# Altium PCB dcdc.PcbDoc
Units mm, origin at the board's own origin, x right, y up, seen from the top; angles counter-clockwise.
Board outline 150 x 70 mm, 4 copper layers (Top Layer, Layer 1, Layer 2, Bottom Layer), stack 0.603 mm thick; 40 components, 19 nets, 301 pads, 311 vias.
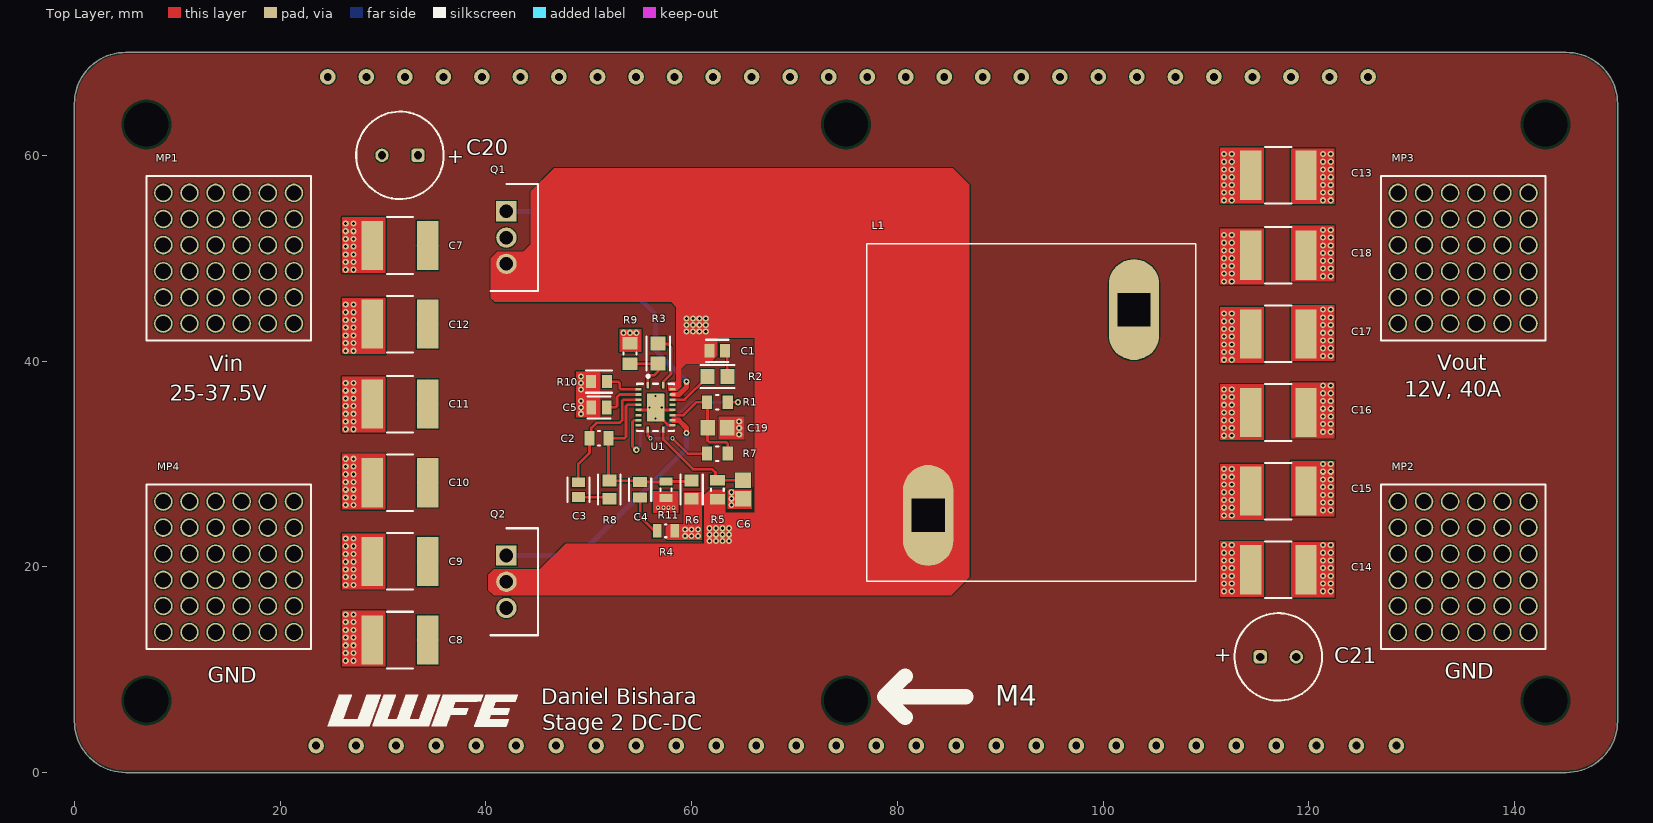
[diagram p0: Top Layer view]
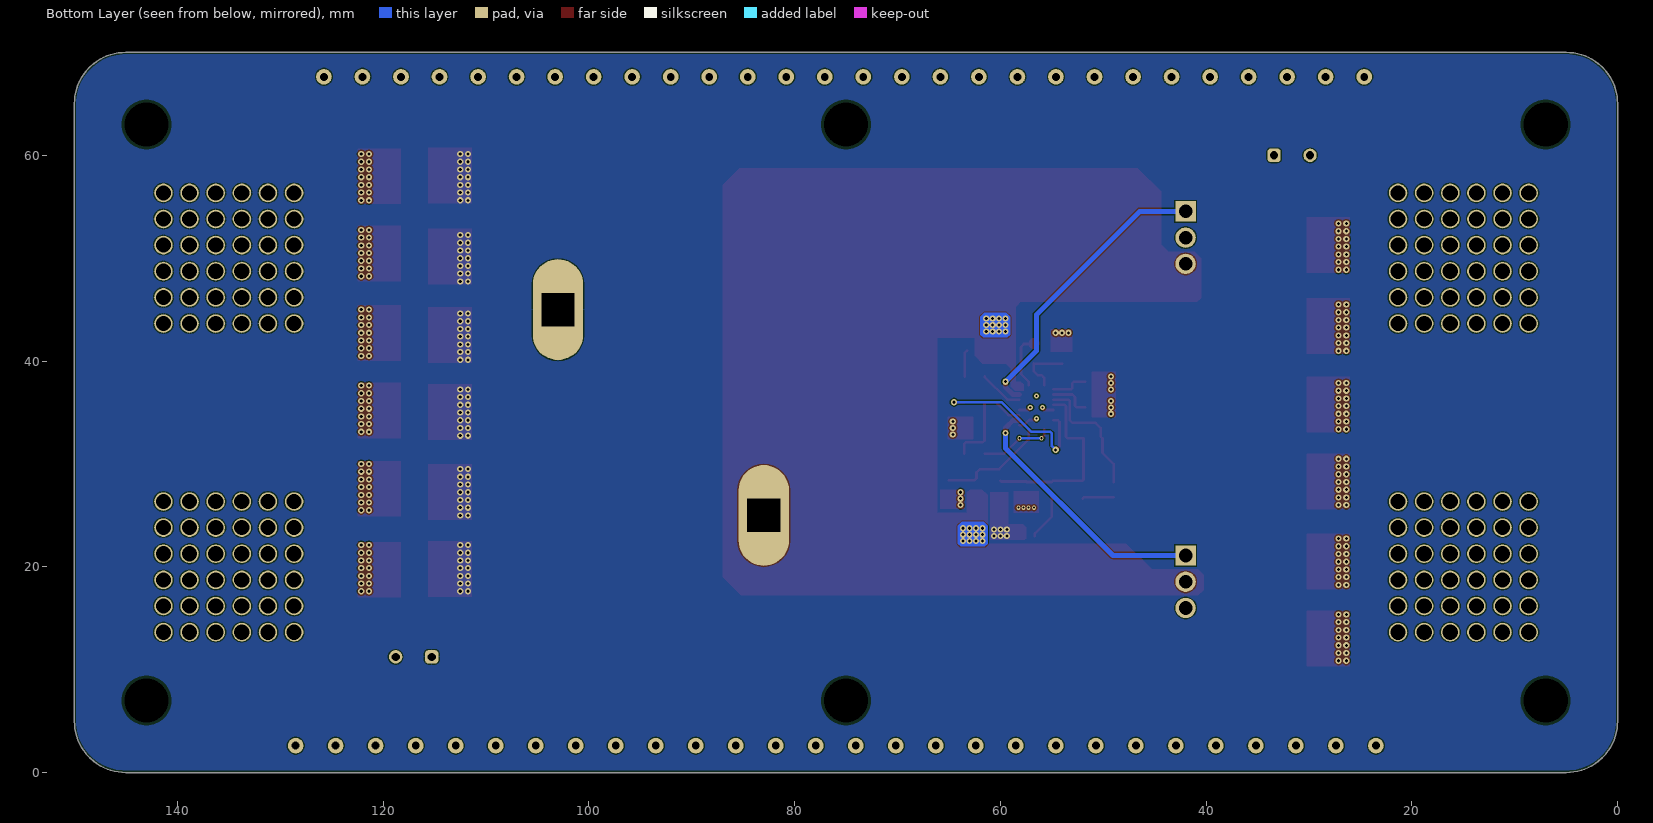
[diagram p1: Bottom Layer view, seen from below]
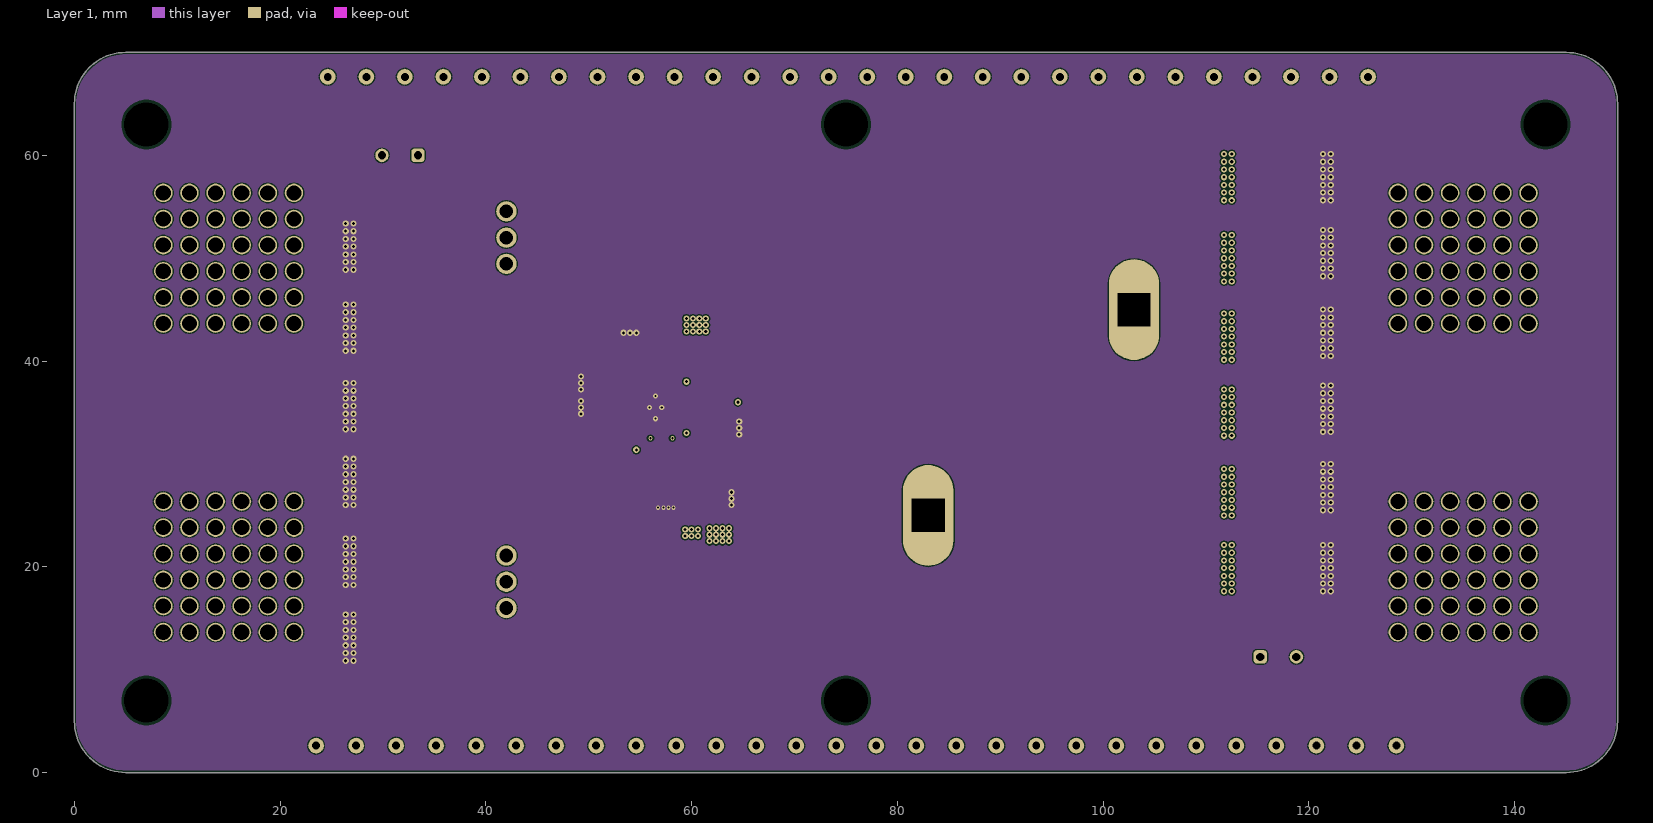
[diagram p2: Layer 1]
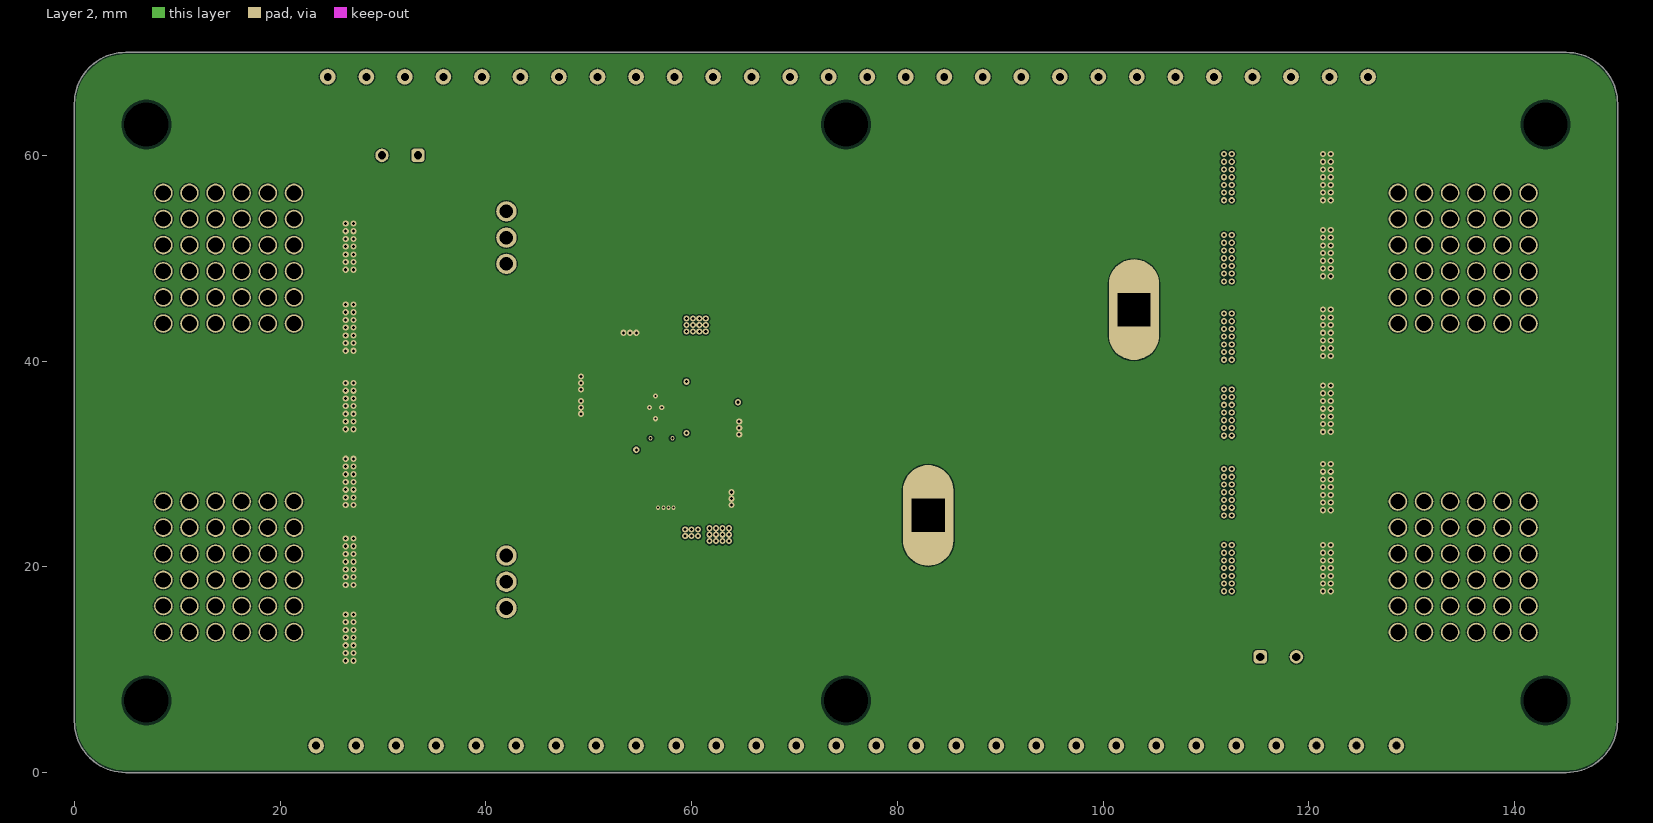
[diagram p3: Layer 2]
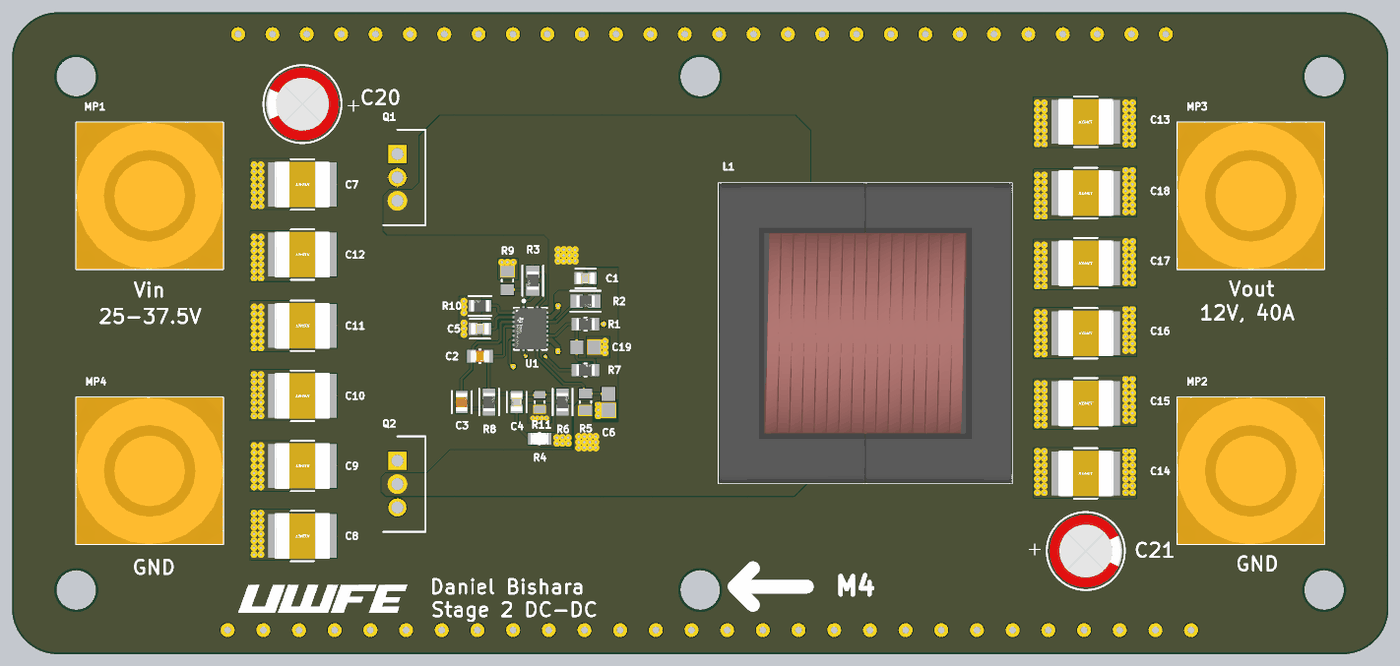
[diagram p4: 3D render of the assembled board from above, using the file's embedded part models]

## Layer stack, top to bottom
Top Solder: solder mask 0.0102, Solder Resist, Dk 3.5
Top Layer: signal copper 0.0356
Dielectric 2: prepreg 0.0711, PP-006, Dk 4.1
Layer 1: signal copper 0.035
Dielectric 1: dielectric 0.32, FR-4, Dk 4.8
Layer 2: signal copper 0.035
Dielectric 3: prepreg 0.0711, PP-006, Dk 4.1
Bottom Layer: signal copper 0.0356
Bottom Solder: solder mask 0.0102, Solder Resist, Dk 3.5

## Board outline
5.006,0.006 cw(c5.006,5.006) 0.006,5.006 0.006,65.006 cw(c5.006,65.006) 5.006,70.006 145.006,70.006 cw(c145.006,65.006) 150.006,65.006 150.006,5.006 cw(c145.006,5.006) 145.006,0.006

## Design rules (kind name [scope] priority, off if disabled: settings)
BoardOutlineClearance [All] p1: gap=0.2 ignorepadtopadclearanceinfootprint=FALSE
Clearance [All] p1: gap=0.102 ignorepadtopadclearanceinfootprint=FALSE except(0.127: Arc-Via Track-Via SMDPad-Via THPad-Via Via-Via Via-Fill Via-Poly Via-Region Via-Text; 0.25: Arc-Hole Track-Hole SMDPad-Hole THPad-Hole Via-Hole Fill-Hole Poly-Hole Region-Hole Text-Hole)
ComponentClearance [All] p1: gap=0.102 collisioncheckmode=3 verticalgap=0.102 showdistances=TRUE
DiffPairsRouting [All] p1: maxlimit=0.102 minlimit=0.102 mostfreqgap=0.102 toplayer_minwidth=0.102 toplayer_maxwidth=1816.048 toplayer_prefwidth=0.102 midlayer1_minwidth=0.102 midlayer1_maxwidth=1816.048 midlayer1_prefwidth=0.102 midlayer2_minwidth=0.102 midlayer2_maxwidth=1816.048 midlayer2_prefwidth=0.102 bottomlayer_minwidth=0.102 bottomlayer_maxwidth=1816.048 bottomlayer_prefwidth=0.102 maxuncoupledlength=12.7
Height [All] p1: minheight=0 maxheight=1816.048 prefheight=12.7
HoleSize [All] p1: absolutevalues=TRUE maxlimit=6.3 minlimit=0.2 maxpercent=80.000 minpercent=20.000
HoleToHoleClearance [All] p1: gap=0.25 allowstackedmicrovias=FALSE
MinimumAnnularRing [All] p1: minimumring=0.076
MinimumSolderMaskSliver [All] p1: minsoldermaskwidth=0
PlaneClearance [All] p1: clearance=0.102
PlaneConnect PlaneConnectPowerPads [InPadClass('PowerPads')] p1: planeconnectstyle=Direct reliefexpansion=0.508 reliefentries=4 reliefconductorwidth=0.254 reliefairgap=0.254
PlaneConnect [All] p2: pad.planeconnectstyle=Relief pad.reliefexpansion=0.3 pad.reliefentries=4 pad.reliefconductorwidth=0.102 pad.reliefairgap=0.102 via.planeconnectstyle=Direct via.reliefexpansion=0.3 via.reliefentries=4 via.reliefconductorwidth=0.127 via.reliefairgap=0.127
PolygonConnect PolygonConnectPowerPads [All vs (InPadClass('PowerPads'))] p1: connectstyle=Direct reliefconductorwidth=0.254 reliefentries=4 polygonreliefangle="90 Angle" airgapwidth=0.254
PolygonConnect [All] p2: thpad.connectstyle=Relief thpad.reliefconductorwidth=0.102 thpad.reliefentries=4 thpad.polygonreliefangle="90 Angle" thpad.airgapwidth=0.102 smdpad.connectstyle=Relief smdpad.reliefconductorwidth=0.102 smdpad.reliefentries=4 smdpad.polygonreliefangle="90 Angle" smdpad.airgapwidth=0.102 via.connectstyle=Direct via.reliefconductorwidth=0.127 via.reliefentries=4 via.polygonreliefangle="90 Angle" via.airgapwidth=0.127
RoutingVias [All] p1: holewidth=0.2 width=0.45 viastyle="Through Hole" minholewidth=0.2 minwidth=0.45 maxholewidth=6.3 maxwidth=6.55
SilkToSilkClearance [All] p1: silktosilkclearance=0
SilkToSolderMaskClearance [IsPad] p1: minsilkscreentomaskgap=0.102 clearancetoexposedcopper=TRUE
SolderMaskExpansion [All] p1: expansion=0.075 istentingtop=FALSE
SupplyNets "Schematic Supply Nets" [InNet('GND')] p1: voltage=0.000
Width [All] p1: maxlimit=1816.048 minlimit=0.102 preferedwidth=0.102
20 further rules are at their usual default settings.

## Classes and differential pairs
component class Conectors: C7 C8 C9 C10 C11 C12 C13 C14 C15 C16 C17 C18 C20 C21 MP1 MP2 MP3 MP4
component class Buck: C1 C2 C3 C4 C5 C6 C19 L1 Q1 Q2 R1 R2 R3 R4 R5 R6 R7 R8 R9 R10 R11 U1

## Components (designator, comment, footprint, x,y, rotation, side; value= is the part's Value field where it differs from the comment)
C1 "C0805C104K5RACTU" FP-C0805C-DN-MFG 62.5,41 r0 top value="0.10 μF"
C2 "CC0805KRX7R9BB221" FP-CC0805-0_85-MFG 51,32.5 r0 top value="220 pF"
C3 "GRM2165C1H472JA01D" FP-GRM216-0_1-IPC_C 49,27.5 r90 top
C4 "C0805C102J5GACTU" FP-C0805C-DN-MFG 55,27.5 r90 top value="1,000 pF"
C5 "C0805C473K5RACTU" FP-C0805C-DN-MFG 51,35.5 r180 top value="47,000 pF"
C6 "C0805C100JDGACTU" CAPC2013X88X50ML20T25 65,27.5 r270 top
C7 "C2220C226M5R2C7289" FP-C2220C226M5R2C7289-MFG 31.651,51.236 r180 top
C8 "C2220C226M5R2C7289" FP-C2220C226M5R2C7289-MFG 31.651,12.889 r180 top
C9 "C2220C226M5R2C7289" FP-C2220C226M5R2C7289-MFG 31.651,20.533 r180 top
C10 "C2220C226M5R2C7289" FP-C2220C226M5R2C7289-MFG 31.651,28.177 r180 top
C11 "C2220C226M5R2C7289" FP-C2220C226M5R2C7289-MFG 31.651,35.821 r180 top
C12 "C2220C226M5R2C7289" FP-C2220C226M5R2C7289-MFG 31.651,43.592 r180 top
C13 "C2220C226M5R2C7289" FP-C2220C226M5R2C7289-MFG 117.026,58.062 r0 top
C14 "C2220C226M5R2C7289" FP-C2220C226M5R2C7289-MFG 117.026,19.715 r0 top
C15 "C2220C226M5R2C7289" FP-C2220C226M5R2C7289-MFG 117.026,27.359 r0 top
C16 "C2220C226M5R2C7289" FP-C2220C226M5R2C7289-MFG 117.026,35.003 r0 top
C17 "C2220C226M5R2C7289" FP-C2220C226M5R2C7289-MFG 117.026,42.647 r0 top
C18 "C2220C226M5R2C7289" FP-C2220C226M5R2C7289-MFG 117.026,50.291 r0 top
C19 "GRM21BR71A225KA01L" CAPC2013X135X50ML10T20 62.5,33.5 r180 top
C20 "860040674004" WCAP-ATUL_D8H11.5 31.651,60 r0 top
C21 "860040674004" WCAP-ATUL_D8H11.5 117.026,11.25 r180 top
L1 "CPRX3231L-8R2MC" CPRX3231L-8R2MC 93,35 r0 top value=8.2uH
MP1 "7461100" "7461100_chemical surface" 15,50 r0 top
MP2 "7461100" "7461100_chemical surface" 135,20 r0 top
MP3 "7461100" "7461100_chemical surface" 135,50 r0 top
MP4 "7461100" "7461100_chemical surface" 15,20 r0 top
Q1 "STP130N6F7" TO255P460X1020X2008-3P 42,54.55 r270 top
Q2 "STP130N6F7" TO255P460X1020X2008-3P 42,21.1 r270 top
R1 "RN73C2A20KBTDF" FP-RN732A-MFG 62.5,36 r0 top value=20KΩ
R2 "RMCF0805JT2R20" FP-RMCF0805-IPC_A 62.5,38.5 r0 top
R3 "RMCF0805FT301K" FP-RMCF0805-IPC_A 56.75,40.75 r270 top
R4 "CRCW0805127RFKEA" FP-CRCW0805-e3-IPC_C 57.5,23.5 r180 top
R5 "RK73H2ATTD2101F" RESC2013X60X30NL20T20 62.5,27.5 r90 top
R6 "RMCF0805FT22K1" FP-RMCF0805-IPC_B 60,27.5 r90 top
R7 "RN73C2A20KBTDF" FP-RN732A-MFG 62.5,31 r0 top value=20KΩ
R8 "RMCF0805FT6K04" FP-RMCF0805-IPC_B 52,27.5 r90 top
R9 "RC0805FR-0713K3L" RESC2013X60X35ML10T20 54,40.75 r90 top
R10 "RMCF0805FT40K2" FP-RMCF0805-IPC_C 51,38 r180 top
R11 "RC0805FR-071K58L" RESC2013X60X35LL10T20 57.5,27.5 r270 top
U1 "LM5146QRGYTQ1" FP-RGY0020B-MFG 56.5,35.5 r0 top

## Footprints (in the part's own frame and the unit in brackets; to place one, negate y for a bottom-side part, rotate by r counter-clockwise, add the part's x,y. Pads: shape width x height; smd on the part's side, far side on the other; paste and mask are expansions set on the pad)
"7461100_chemical surface" [mm] "M10, thread 16mm"
  round 1.8 hole 1.475: 1(-6.35,-6.35) 1(-6.35,-3.81) 1(-6.35,-1.27) 1(-6.35,1.27) 1(-6.35,3.81) 1(-6.35,6.35) 1(-3.81,-6.35) 1(-3.81,-3.81) 1(-3.81,-1.27) 1(-3.81,1.27) 1(-3.81,3.81) 1(-3.81,6.35) 1(-1.27,-6.35) 1(-1.27,-3.81) 1(-1.27,-1.27) 1(-1.27,1.27) 1(-1.27,3.81) 1(-1.27,6.35) 1(1.27,-6.35) 1(1.27,-3.81) 1(1.27,-1.27) 1(1.27,1.27) 1(1.27,3.81) 1(1.27,6.35) 1(3.81,-6.35) 1(3.81,-3.81) 1(3.81,-1.27) 1(3.81,1.27) 1(3.81,3.81) 1(3.81,6.35) 1(6.35,-6.35) 1(6.35,-3.81) 1(6.35,-1.27) 1(6.35,1.27) 1(6.35,3.81) 1(6.35,6.35)
  silkscreen extent -8,-8 8,8, body extent -8,-8 8,8, height 24
CAPC2013X88X50ML20T25 [mm] "Chip Capacitor, 2-Leads, Body 2.00x1.25mm, IPC Low Density"
  rect 1.5x1.55 smd: 1(-0.9,0) 2(0.9,0)
  body extent -1.1,-0.72 1.1,0.72, height 0.88
CAPC2013X135X50ML10T20 [mm] "Chip Capacitor, 2-Leads, Body 2.00x1.25mm, IPC Low Density"
  rect 1.4x1.5 smd: 1(-0.95,0) 2(0.95,0)
  body extent -1.05,-0.67 1.05,0.67, height 1.35
CPRX3231L-8R2MC [mm]
  oval 4.9x9.8 hole 3.2 square: 1(-10,-10) 2(10,10)
  silkscreen extent -16,-16.4 16,16.4, body extent -16,-16.4 16,16.4, height 28.5
FP-C0805C-DN-MFG [mm]
  rect 0.95x1.35 smd paste+0 mask+0: 1(-0.75,0) 2(0.75,0)
  silkscreen extent -1.1,-1.07 1.1,1.07, body extent -1.4,-0.85 1.4,0.85, height 0.25
FP-C2220C226M5R2C7289-MFG [mm]
  rect 2.08x4.78 smd paste+0 mask+0: 1(-2.69,0) 2(2.69,0)
  silkscreen extent -1.28,-2.75 1.28,2.75, body extent -3.85,-3 3.85,3, height 0.25
FP-CC0805-0_85-MFG [mm]
  rect 0.95x1.4 smd paste+0 mask+0: 1(-0.925,0) 2(0.925,0)
  silkscreen extent -0.08,-0.72 0.08,0.72, body extent -1.6,-1.05 1.6,1.05, height 0.25
FP-CRCW0805-e3-IPC_C [mil]
  rect 31.75x51.5 smd paste+0 mask+0: 1(-33.5,0) 2(33.5,0)
  silkscreen extent -3,-25 3,25, body extent -53,-31 53,31, height 10
FP-GRM216-0_1-IPC_C [mm]
  rect 0.958x1.261 smd paste+0 mask+0: 1(-0.727,0) 2(0.727,0)
  silkscreen extent -1.21,-1.07 1.21,1.07, body extent -1.31,-0.77 1.31,0.77, height 0.25
FP-RGY0020B-MFG [mm]
  rrect40% 0.25x0.6 smd paste+0 mask+0: 1(-0.75,2.15) 10(-0.75,-2.15) 11(0.75,-2.15) 20(0.75,2.15)
  rrect40% 0.6x0.25 smd paste+0 mask+0: 2(-1.65,1.75) 3(-1.65,1.25) 4(-1.65,0.75) 5(-1.65,0.25) 6(-1.65,-0.25) 7(-1.65,-0.75) 8(-1.65,-1.25) 9(-1.65,-1.75) 12(1.65,-1.75) 13(1.65,-1.25) 14(1.65,-0.75) 15(1.65,-0.25) 16(1.65,0.25) 17(1.65,0.75) 18(1.65,1.25) 19(1.65,1.75)
  rrect6% 1.7x2.7 smd paste-1000 mask+0: 21(0,0)
  silkscreen extent -1.8,-2.3 1.8,3.15, body extent -2.05,-2.55 2.05,2.55, height 0.25
FP-RMCF0805-IPC_A [mm]
  rect 1.355x1.462 smd paste+0 mask+0: 1(-0.976,0) 2(0.976,0)
  silkscreen extent -1.65,-1.13 1.65,1.13, body extent -2.15,-1.23 2.15,1.23, height 0.25
FP-RMCF0805-IPC_B [mm]
  rect 1.155x1.362 smd paste+0 mask+0: 1(-0.876,0) 2(0.876,0)
  silkscreen extent -1.45,-1.08 1.45,1.08, body extent -1.7,-0.93 1.7,0.93, height 0.25
FP-RMCF0805-IPC_C [mm]
  rect 0.955x1.262 smd paste+0 mask+0: 1(-0.776,0) 2(0.776,0)
  silkscreen extent -1.25,-1.07 1.25,1.07, body extent -1.35,-0.77 1.35,0.77, height 0.25
FP-RN732A-MFG [mm]
  rect 1x1.35 smd paste+0 mask+0: 1(-1,0) 2(1,0)
  silkscreen extent -0.13,-0.7 0.13,0.7, body extent -1.6,-0.8 1.6,0.8, height 0.25
RESC2013X60X30NL20T20 [mm] "Chip Resistor, 2-Leads, Body 2.00x1.25mm, IPC Medium Density"
  rect 1.05x1.45 smd: 1(-0.925,0) 2(0.925,0)
  silkscreen extent -0.1,-0.63 0.1,0.63, body extent -1.1,-0.72 1.1,0.72, height 0.6
RESC2013X60X35LL10T20 [mm] "Chip Resistor, 2-Leads, Body 2.00x1.25mm, IPC High Density"
  rect 0.8x1.25 smd: 1(-0.8,0) 2(0.8,0)
  silkscreen extent -0.1,-0.53 0.1,0.53, body extent -1.05,-0.67 1.05,0.67, height 0.6
RESC2013X60X35ML10T20 [mm] "Chip Resistor, 2-Leads, Body 2.00x1.25mm, IPC Low Density"
  rect 1.2x1.45 smd: 1(-1,0) 2(1,0)
  silkscreen extent -0.1,-0.63 0.1,0.63, body extent -1.05,-0.67 1.05,0.67, height 0.6
TO255P460X1020X2008-3P [mm]
  rect 1.98x1.98 / inner round 1.98 / far side rect 1.98x1.98 hole 1.32: 1(0,0)
  round 1.98 hole 1.32: 2(2.55,0) 3(5.1,0)
  silkscreen extent -2.65,-1.53 7.75,3.07
WCAP-ATUL_D8H11.5 [mm] "Aluminum Electrolytic Capacitors, 8x11.5mm"
  rrect50% 1.3x1.3 hole 0.8: 1(1.75,0)
  round 1.3 hole 0.8: 2(-1.75,0)
  silkscreen extent -4.25,-4.25 4.25,4.25, body extent -3.99,-4 4,4, height 11.81

## Part data
C1: library part CMP-2007-00279-2, "CAP CER 0.1UF 50V X7R 0805", Capacitance="0.10 μF", Manufacturer=KEMET, Package=C0805C-DN, Temperature="-55°C to +125°C", Temperature Characteristic=X7R, Temperature Coefficient=30ppm/°C, Temperature Range High=+125°C, Temperature Range Low=-55°C, Tolerance=0.1, Voltage Rating="50 V", Automotive=No, Category=Cap, ComponentLink2Description=Datasheet, ComponentLink2URL=https://content.kemet.com/datasheets/KEM_C1003_C0G_SMD.pdf, Device Class L1="Passive Components", Device Class L2=Capacitors, Device Class L3="Ceramic Capacitors", Digikey Description="CAP CER 0.1UF 50V X7R 0805", Height=0.88mm, Ipc Land Pattern Name=CAPC200125X78, Lead Free=Yes, Manufacturer Part Number=C0805C104K5RACTU, Material=Ceramic, Mouser Description="Cap Ceramic 0.1uF 50V X7R 10% SMD 2.0 x 1.2 mm 125 C Paper T/R", Octopart=https://octopart.com/c0805c104k5ractu-kemet-143926, RoHS=TRUE
C2: library part CMP-1036-02315-3, "CAP CER 220PF 50V X7R 0805", Capacitance="220 pF", Manufacturer=Yageo, Package=CC0805-0.85, Temperature="-30°C to +85°C", Temperature Characteristic=X7R, Temperature Range High=+85°C, Temperature Range Low=-30°C, Tolerance=0.1, Voltage Rating="50 V", Automotive=No, Category=Cap, ComponentLink2Description=Datasheet, ComponentLink2URL=http://www.yageo.com/documents/recent/UPY-GPHC_Y5V_6.3V-to-50V_8.pdf, Device Class L1="Passive Components", Device Class L2=Capacitors, Device Class L3="Ceramic Capacitors", Digikey Description="CAP CER 220PF 50V X7R 0805", Footprint Url=http://www.yageo.com/exep/pages/download/literatures/UPY-C_GEN_24.pdf, Height=0.95mm, Ipc Land Pattern Name=CAPC200125X85, Lead Free=Yes, Manufacturer Part Number=CC0805KRX7R9BB221, Material=Ceramic, Mouser Description="Surface Mount Ceramic Multilayer Capacitor 220pF 10% X7R 50V 0805 Paper T/R", Octopart=https://octopart.com/cc0805krx7r9bb221-yageo-39467731, RoHS=TRUE
C3: library part CMP-1036-03587-2, "Chip Multilayer Ceramic Capacitors for General Purpose, 0805, 4700pF, C0G, 30ppm/°C, 5%, 50V", Capacitance=4.7nF, Case Code (Imperial)=0805, Case Code (Metric)=2012, Dielectric=C0G, Max Operating Temperature=125°C, Min Operating Temperature=-55°C, Package Quantity=1, Temperature Coefficient=30ppm/°C, Tolerance=5%, Voltage=50V, Case/Package=0805, Depth=1.25mm, Height=0.6mm, Lead Free="Lead Free", Length=2mm, Material=Ceramic, Mount="Surface Mount", Number of Pins=2, Packaging="Tape and Reel", REACH SVHC="No SVHC", RoHS Compliant=Yes, Termination=SMD/SMT, Thickness=0.028inch, Voltage Rating=50V, Voltage Rating (DC)=50V, Width=0.049inch
C4: library part CMP-2007-00235-2, "CAP CER 1000PF 50V C0G/NP0 0805", Capacitance="1,000 pF", Manufacturer=KEMET, Package=C0805C-DN, Temperature="-55°C to +125°C", Temperature Characteristic=C0G, Temperature Coefficient=30ppm/°C, Temperature Range High=+125°C, Temperature Range Low=-55°C, Tolerance=0.05, Voltage Rating="50 V", Automotive=No, Category=Cap, ComponentLink2Description=Datasheet, ComponentLink2URL=https://content.kemet.com/datasheets/KEM_C1003_C0G_SMD.pdf, Device Class L1="Passive Components", Device Class L2=Capacitors, Device Class L3="Ceramic Capacitors", Digikey Description="CAP CER 1000PF 50V C0G/NP0 0805", Height=0.88mm, Ipc Land Pattern Name=CAPC200125X78, Lead Free=Yes, Manufacturer Part Number=C0805C102J5GACTU, Material=Ceramic, Mouser Description="Multilayer Ceramic Capacitors MLCC - SMD/SMT 50volts 1000pF C0G 5%", Octopart=https://octopart.com/c0805c102j5gactu-kemet-97757, RoHS=TRUE
C5: library part CMP-2007-01098-2, "CAP CER 0.047UF 50V X7R 0805", Capacitance="47 nF", Manufacturer=KEMET, Package=C0805C-DN, Temperature="-55°C to +125°C", Temperature Characteristic=X7R, Temperature Coefficient=30ppm/°C, Temperature Range High=+125°C, Temperature Range Low=-55°C, Tolerance=0.1, Voltage Rating="50 V", Automotive=No, Category=Cap, ComponentLink2Description=Datasheet, ComponentLink2URL=https://content.kemet.com/datasheets/KEM_C1003_C0G_SMD.pdf, Device Class L1="Passive Components", Device Class L2=Capacitors, Device Class L3="Ceramic Capacitors", Digikey Description="CAP CER 0.047UF 50V X7R 0805", Height=0.88mm, Ipc Land Pattern Name=CAPC200125X78, Lead Free=Yes, Manufacturer Part Number=C0805C473K5RACTU, Material=Ceramic, Mouser Description="Capacitor; Ceramic; Cap 0.047 uF; Tol 10%; Vol-Rtg 50 VDC; SMT; 0805; X7R; Tape&Reel", Octopart=https://octopart.com/c0805c473k5ractu-kemet-138387, RoHS=TRUE
C6: library part CMP-2007-00220-1, Capacitance=10pF, Manufacturer=Kemet, Part Number=C0805C100JDGACTU
C7 C8 C9 C10 C11 C12 C13 C14 C15 C16 C17 C18: library part CMP-03020-034691-1, "CAP CER 22UF 50V X7R SMD", Capacitance=22uF, Case/Package=SMD/SMT, Dielectric Material=Ceramic, Max Operating Temperature=125°C, Min Operating Temperature=-55°C, Package Quantity=1, Tolerance=20%, Voltage Rating=50V, Length=0.236inch, Mount="Surface Mount", Packaging="Tape and Reel", RoHS Compliant=Yes, Thickness=0.217inch, Voltage Rating (DC)=50V, Width=0.197inch
C19: library part CMP-2007-03454-1, Capacitance=2.2uF, Manufacturer=Murata, Part Number=GRM21BR71A225KA01L
C20 C21: library part CMP-03913-53914310-2, "WCAP-ATUL Aluminum Electrolytic Capacitors", Capacitance=100µF, Case/Package=Radial, Leakage Current=50µA, Max Operating Temperature=105°C, Min Operating Temperature=-40°C, Ripple Current=680mA, Tolerance=20%, Voltage Rating=50V, Diameter=8mm, Height=11.5mm, Height - Seated (Max)=13.0048mm, Impedance=160mΩ, Lead Pitch=3.5052mm, Length=11.5mm, Life (Hours)=7000hours, Mount="Through Hole", Packaging="Tape & Box (TB)", Pitch=3.5mm, Polarity=Polar, REACH SVHC=Unknown, RoHS=Compliant, Voltage Rating (DC)=50V
L1: Package=None, Availability=Unavailable, MP=CPEX3231A-330MC, Price=None
MP1 MP2 MP3 MP4: library part CMP-03913-18187408-2, "PCB power element shank terminal, 36P M10", Current Rating=350A, Max Operating Temperature=150°C, Min Operating Temperature=-55°C, Contact Material=Copper, Contact Plating=Tin, Height=24mm, Insulation=Non-Insulated, Length=16mm, Material=Brass, Mount="Through Hole", Number of Contacts=36, Number of Pins=36, Packaging=Bulk, REACH SVHC=Unknown, RoHS=Compliant, Termination=Press-Fit, Thread Size=M10, Width=16mm
Q1 Q2: "N-channel 60 V, 4.2 m typ., 80 A STripFET F7 Power MOSFET in a TO-220 package", Manufacturer_Name=STMicroelectronics, Mouser Part Number=511-STP130N6F7, Datasheet Link=https://www.st.com/resource/en/datasheet/stp130n6f7.pdf, Geometry.Height=4.6mm, Manufacturer_Part_Number=STP130N6F7, Mouser Price/Stock=https://www.mouser.co.uk/ProductDetail/STMicroelectronics/STP130N6F7?qs=bKenfurwlsnAlTA32qCHLw%3D%3D
R1 R7: library part CMP-03211-001671-1, "SMD Chip Resistor, Thin Film, 20KΩ, 100 V, 0805 [2012 Metric], 100 mW, 0.1%, RN73 Series", Manufacturer="TE Connectivity", Package=RN732A, Power Rating=0.1W, Resistance=20KΩ, Temperature="-55°C to 155°C", Temperature Coefficient=10ppm/°C, Temperature Range High=155°C, Temperature Range Low=-55°C, Tolerance=0.1%, Voltage Rating=100V, Automotive=No, Category=Res, ComponentLink2Description=Datasheet, ComponentLink2URL=https://www.te.com/commerce/DocumentDelivery/DDEController?Action=showdoc&DocId=Data+Sheet%7F1773270%7FP%7Fpdf%7FEnglish%7FENG_DS_1773270_P.pdf%7F1676162-2, Composition="Thin Film", Device Class L1="Passive Components", Device Class L2=Resistors, Device Class L3="Chip SMD Resistors", Height=0.65mm, Ipc Land Pattern Name=RESC200125X55, Lead Free=Yes, Manufacturer Part Number=RN73C2A20KBTDF, Octopart=https://octopart.com/rn73c2a20kbtdf-te+connectivity-21411984, octopart_url=https://octopart.com/rn73c2a20kbtdf-te+connectivity-21411984, Packaging="1000 Reel", RoHS=TRUE, SERIES=RN73
R2: library part CMP-26527-001415-1, "2.2Ω ±5% 0.125W 0805 Thick Film Chip Resistor AEC-Q200 compliant", Case Code (Imperial)=0805, Case Code (Metric)=2012, Max Operating Temperature=155°C, Max Power Dissipation=125mW, Min Operating Temperature=-55°C, Resistance=2.2Ω, Resistor Type="Thick Film", Temperature Coefficient=200ppm/°C, Tolerance=5%, Case/Package=0805, Contact Plating=Tin, Features="Automotive AEC-Q200", Height=0.026inch, Lead Free="Lead Free", Length=0.079inch, Mount="Surface Mount", Number of Terminations=2, Packaging="Tape and Reel", Radiation Hardening=No, RoHS Compliant=Yes, SERIES=RMCF, Width=0.049inch
R3: library part CMP-26527-003666-1, "301kΩ ±1% 0.125W 0805 Thick Film Chip Resistor AEC-Q200 compliant", Case Code (Imperial)=0805, Case Code (Metric)=2012, Max Operating Temperature=155°C, Max Power Dissipation=125mW, Min Operating Temperature=-55°C, Resistance=301kΩ, Resistor Type="Thick Film", Temperature Coefficient=100ppm/°C, Tolerance=1%, Case/Package=0805, Construction=Rectangular, Contact Plating=Tin, Depth=1.25mm, Features="Automotive AEC-Q200", Height=0.026inch, Lead Free="Lead Free", Length=0.079inch, Military Standard=Not, Mount="Surface Mount", Number of Terminations=2, Packaging="Tape and Reel", Radiation Hardening=No, RoHS Compliant=Yes, SERIES=RMCF, Width=0.049inch
R4: library part CMP-1013-00408-3, "RES Thick Film, 127Ω, 1%, 0.125W, 100ppm/°C, 0805", Case Code (Imperial)=0805, Case Code (Metric)=2012, Max Operating Temperature=155°C, Max Power Dissipation=125mW, Min Operating Temperature=-55°C, Package Quantity=10, Resistance=127R, Resistance Tolerance=1%, Resistor Type="Thick Film", Temperature Coefficient=100ppm/°C, Voltage Rating=150V, Case/Package=0805, Construction=Rectangular, Contact Plating=Tin, Depth=1.25mm, Features="Automotive AEC-Q200", Height=0.02inch, Lead Free="Lead Free", Length=2mm, Military Standard=Not, Number of Pins=2, Number of Terminations=2, Packaging="Tape and Reel", Power Rating=125mW, Radiation Hardening=No, RoHS Compliant=Yes, SERIES=CRCW, Termination=SMD/SMT, Tolerance=1%, Voltage Rating (DC)=150V, Weight=0.000194oz, Width=0.049inch
R5: library part CMP-2001-02195-1, Manufacturer="KOA Speer", Resistance=2.1kΩ, Part Number=RK73H2ATTD2101F
R6: library part CMP-26527-001411-1, "22.1kΩ ±1% 0.125W 0805 Thick Film Chip Resistor AEC-Q200 compliant", Case Code (Imperial)=0805, Case Code (Metric)=2012, Max Operating Temperature=155°C, Max Power Dissipation=125mW, Min Operating Temperature=-55°C, Resistance=22.1kR, Resistor Type="Thick Film", Temperature Coefficient=100ppm/°C, Tolerance=1%, Case/Package=0805, Construction=Rectangular, Contact Plating=Tin, Depth=1.25mm, Features="Automotive AEC-Q200", Height=0.026inch, Lead Free="Lead Free", Length=0.079inch, Military Standard=Not, Mount="Surface Mount", Number of Terminations=2, Packaging="Tape and Reel", Power Rating=125mW, Radiation Hardening=No, RoHS Compliant=Yes, SERIES=RMCF, Size Code=0805, Width=0.049inch
R8: library part CMP-26527-005687-1, "6.04kΩ ±1% 0.125W 0805 Thick Film Chip Resistor AEC-Q200 compliant", Case Code (Imperial)=0805, Case Code (Metric)=2012, Max Operating Temperature=155°C, Max Power Dissipation=125mW, Min Operating Temperature=-55°C, Resistance=6.04kR, Resistor Type="Thick Film", Temperature Coefficient=100ppm/°C, Tolerance=1%, Case/Package=0805, Construction=Rectangular, Contact Plating=Tin, Depth=1.25mm, Features="Automotive AEC-Q200", Height=0.026inch, Lead Free="Lead Free", Length=0.079inch, Military Standard=Not, Mount="Surface Mount", Number of Terminations=2, Packaging="Tape and Reel", Power Rating=125mW, Radiation Hardening=No, RoHS Compliant=Yes, SERIES=RMCF, Size Code=0805, Width=0.049inch
R9: library part CMP-2001-00918-1, Manufacturer=Yageo, Resistance=13.3kΩ, Part Number=RC0805FR-0713K3L
R10: library part CMP-26527-006371-1, "40.2kΩ ±1% 0.125W 0805 Thick Film Chip Resistor AEC-Q200 compliant", Case Code (Imperial)=0805, Case Code (Metric)=2012, Max Operating Temperature=155°C, Max Power Dissipation=125mW, Min Operating Temperature=-55°C, Resistance=40.2kR, Resistor Type="Thick Film", Temperature Coefficient=100ppm/°C, Tolerance=1%, Case/Package=0805, Construction=Rectangular, Contact Plating=Tin, Depth=1.25mm, Features="Automotive AEC-Q200", Height=0.026inch, Lead Free="Lead Free", Length=2mm, Military Standard=Not, Mount="Surface Mount", Number of Terminations=2, Packaging="Tape and Reel", Power Rating=125mW, Radiation Hardening=No, RoHS Compliant=Yes, SERIES=RMCF, Size Code=0805, Width=0.049inch
R11: library part CMP-2001-00963-1, Manufacturer=Yageo, Resistance=1.58k, Part Number=RC0805FR-071K58L
U1: library part CMP-04918-000302-1, "IC REG BUCK ADJ 3.5A 20VQFN", RoHS Compliant=Yes

## Free pads (board coordinates)
  round 1.524 hole 4.3 unplated: 5(7,7) 5(7,63) 5(75,7) 5(75,63) 5(143,7) 5(143,63)
  round 1.524 hole 0.762: 6(23.5,2.625) 6(28.384,67.625) 7(24.639,67.625) 7(27.389,2.625) 8(31.278,2.625) 8(32.129,67.625) 9(35.167,2.625) 9(35.873,67.625) 10(39.056,2.625) 10(39.618,67.625) 11(50.722,2.625) 11(50.853,67.625) 12(54.598,67.625) 12(54.611,2.625) 13(65.832,67.625) 13(66.278,2.625) 14(73.322,67.625) 14(74.056,2.625) 15(80.812,67.625) 15(81.833,2.625) 16(92.046,67.625) 16(93.5,2.625) 17(99.536,67.625) 17(101.278,2.625) 18(77.067,67.625) 18(77.944,2.625) 19(58.343,67.625) 19(58.5,2.625) 20(42.944,2.625) 20(43.363,67.625) 21(46.833,2.625) 21(47.108,67.625) 22(62.087,67.625) 22(62.389,2.625) 23(69.577,67.625) 23(70.167,2.625) 24(88.301,67.625) 24(89.611,2.625) 25(95.791,67.625) 25(97.389,2.625) 26(107.026,67.625) 26(109.056,2.625) 27(103.281,67.625) 27(105.167,2.625) 28(107.026,67.625) 28(109.056,2.625) 29(118.26,67.625) 29(120.722,2.625) 30(122.005,67.625) 30(124.611,2.625) 31(125.75,67.625) 31(128.5,2.625) 32(110.771,67.625) 32(112.944,2.625) 33(114.515,67.625) 33(116.833,2.625) 34(84.557,67.625) 34(85.722,2.625)

## Via types
v1: diameter 0.6, hole 0.3, Top Layer to Bottom Layer, 301 vias
v2: diameter 0.4, hole 0.2, Top Layer to Bottom Layer, 6 vias
v3: diameter 0.5, hole 0.2, Top Layer to Bottom Layer, 4 vias

## Nets (pads, with @x,y where several pads share a name; then routed paths per layer and width w, separated by ;. In a path a pad name is that pad's centre, name@x,y a point inside that pad or via, vN(x,y) a via of type N, cw(c..) or ccw(c..) an arc to the next point about the centre after c; other vN are vias at no path point)
Comp: C2.1 C3.2 U1.4 | length 12.6
  Top Layer w0.254: C3.2 49,30 50.075,31.075 C2.1 50.25,32.675 50.25,33.5 50.75,34 53,34 53.25,34.25 53.25,36.101 53.399,36.25 U1.4
En: R3.2 R9.1 U1.1 | length 5.5
  Top Layer w0.254: R9.1 56.726,39.75 R3.2 ; U1.1 55.75,38.375 56,38.625 56.375,38.625 56.75,39 R3.2@56.75,39.75
Fb: C2.2 C4.2 R6.2 R8.2 R11.1 U1.5 | length 18.3
  Top Layer w0.254: U1.5 53.774,35.75 53.625,35.601 53.625,32.649 53.476,32.5 C2.2 51.925,28.451 R8.2 54.874,28.376 C4.2 57.45,28.25 R11.1 59.924,28.3 R6.2
GND: C5.2 C6.2 C7.2 C8.2 C9.2 C10.2 C11.2 C12.2 C13.2 C14.2 C15.2 C16.2 C17.2 C18.2 C19.1 C20.2 C21.2 MP2.1 MP4.1 pad.6 pad.7 pad.8 pad.9 pad.10 pad.11 pad.12 pad.13 pad.14 pad.15 pad.16 pad.17 pad.18 pad.19 pad.20 pad.21 pad.22 pad.23 pad.24 pad.25 pad.26 pad.27 pad.28 pad.29 pad.30 pad.31 pad.32 pad.33 pad.34 Q2.3 R9.2 R10.2 R11.2 U1.6 U1.12 U1.15 U1.21 | length 4.4
  Top Layer w0.254: U1.6 55.777,35.25 55.9,35.373 v3(55.9,35.5) ; v3(56.5,34.4) 56.623,34.277 57.223,34.277 57.75,33.75 U1.12 ; v3(57.1,35.5) 57.1,35.373 57.223,35.25 U1.15
  other v1: 26.375,10.875 27.125,10.875 26.375,11.625 27.125,11.625 26.375,12.375 27.125,12.375 26.375,13.125 27.125,13.125 26.375,13.875 27.125,13.875 26.375,14.625 27.125,14.625 26.375,15.375 27.125,15.375 121.375,17.625 122.125,17.625 26.375,18.25 27.125,18.25 121.375,18.375 122.125,18.375 26.375,19 27.125,19 121.375,19.125 122.125,19.125 26.375,19.75 27.125,19.75 121.375,19.875 122.125,19.875 26.375,20.5 27.125,20.5 121.375,20.625 122.125,20.625 26.375,21.25 27.125,21.25 121.375,21.375 122.125,21.375 26.375,22 27.125,22 121.375,22.125 122.125,22.125 26.375,22.75 27.125,22.75 121.375,25.5 122.125,25.5 26.375,26 27.125,26 63.875,26 121.375,26.25 122.125,26.25 63.875,26.625 26.375,26.75 27.125,26.75 121.375,27 122.125,27 63.875,27.25 26.375,27.5 27.125,27.5 121.375,27.75 122.125,27.75 26.375,28.25 27.125,28.25 121.375,28.5 122.125,28.5 26.375,29 27.125,29 121.375,29.25 122.125,29.25 26.375,29.75 27.125,29.75 121.375,30 122.125,30 26.375,30.5 27.125,30.5 64.625,32.875 121.375,33.125 122.125,33.125 26.375,33.375 27.125,33.375 64.625,33.5 121.375,33.875 122.125,33.875 26.375,34.125 27.125,34.125 64.625,34.125 121.375,34.625 122.125,34.625 26.375,34.875 27.125,34.875 49.25,34.875 121.375,35.375 122.125,35.375 49.25,35.5 26.375,35.625 27.125,35.625 49.25,36.125 121.375,36.125 122.125,36.125 26.375,36.375 27.125,36.375 121.375,36.875 122.125,36.875 26.375,37.125 27.125,37.125 49.25,37.25 121.375,37.625 122.125,37.625 26.375,37.875 27.125,37.875 49.25,37.875 49.25,38.5 121.375,40.5 122.125,40.5 26.375,41 27.125,41 121.375,41.25 122.125,41.25 26.375,41.75 27.125,41.75 121.375,42 122.125,42 26.375,42.5 27.125,42.5 53.375,42.75 54,42.75 54.625,42.75 121.375,42.75 122.125,42.75 26.375,43.25 27.125,43.25 121.375,43.5 122.125,43.5 26.375,44 27.125,44 121.375,44.25 122.125,44.25 26.375,44.75 27.125,44.75 121.375,45 122.125,45 26.375,45.5 27.125,45.5 121.375,48.25 122.125,48.25 26.375,48.875 27.125,48.875 121.375,49 122.125,49 26.375,49.625 27.125,49.625 121.375,49.75 122.125,49.75 26.375,50.375 27.125,50.375 121.375,50.5 122.125,50.5 26.375,51.125 27.125,51.125 121.375,51.25 122.125,51.25 26.375,51.875 27.125,51.875 121.375,52 122.125,52 26.375,52.625 27.125,52.625 121.375,52.75 122.125,52.75 26.375,53.375 27.125,53.375 121.375,55.625 122.125,55.625 121.375,56.375 122.125,56.375 121.375,57.125 122.125,57.125 121.375,57.875 122.125,57.875 121.375,58.625 122.125,58.625 121.375,59.375 122.125,59.375 121.375,60.125 122.125,60.125
  other v2: 56.75,25.75 57.25,25.75 57.75,25.75 58.25,25.75
  other v3: 56.5,36.6
Ho: Q1.1 U1.18 | length 28.6
  Top Layer w0.5: U1.18 58.785,36.75 59.5,37.465 v1(59.5,38)
  Bottom Layer w0.5: Q1.1 46.45,54.55 56.5,44.5 56.5,41 v1(59.5,38)
ILIM: C6.1 R5.2 U1.11 | length 10.7
  Top Layer w0.254: U1.11 57.25,32.375 60.125,29.5 62,29.5 62.318,29.182 62.318,28.607 R5.2 64.975,28.425 C6.1
Lo: Q2.1 U1.13 | length 25.4
  Top Layer w0.5: U1.13@58.2,34.25 58.758,34.25 59.5,33.508 v1@59.5,33.027
  Bottom Layer w0.5: Q2.1 49.068,21.1 59.5,31.532 v1(59.5,33)
NetC1_2: C1.2 R2.2 | length 2.6
  Top Layer w0.254: C1.2 63.476,40.774 R2.2
NetC3_1: C3.1 R8.1 | length 3.1
  Top Layer w0.254: C3.1 51.851,26.773 R8.1
NetC4_1: C4.1 R4.2 | length 4.4
  Top Layer w0.254: C4.1 55,24.9 56.649,23.251 R4.2@56.649,23
NetR2_1: R2.1 U1.17 | length 4.3
  Top Layer w0.254: U1.17 59.328,36.25 61.524,38.446 R2.1
Pgood: R7.1 U1.10 | length 7.1
  Top Layer w0.254: U1.10 55.75,32.75 v2(56,32.5) ; v2(58.125,32.5) 59.625,31 R7.1
  Bottom Layer w0.254: v2(56,32.5) v2(58.125,32.5)
Rt: R10.1 U1.2 | length 3.6
  Top Layer w0.254: R10.1 52.851,38 53,37.851 53,37.399 53.149,37.25 U1.2
SS: C5.1 U1.3 | length 4.1
  Top Layer w0.254: C5.1 52.601,35.5 52.75,35.649 52.75,36.5 53,36.75 U1.3
Sw: C1.1 L1.1 Q1.3 Q2.2 R5.1 U1.19
  other v1: 61.75,22.5 62.375,22.5 63,22.5 63.625,22.5 61.75,23.125 62.375,23.125 63,23.125 63.625,23.125 61.75,23.75 62.375,23.75 63,23.75 63.625,23.75 59.5,42.875 60.125,42.875 60.75,42.875 61.375,42.875 59.5,43.5 60.125,43.5 60.75,43.5 61.375,43.5 59.5,44.125 60.125,44.125 60.75,44.125 61.375,44.125
SyncIn: R1.2 U1.8 | length 17.1
  Top Layer w0.254: v1(54.625,31.375) 54.572,31.375 54.25,31.697 54.25,34.101 54.399,34.25 U1.8 ; R1.2 v1(64.5,36)
  Bottom Layer w0.254: v1(54.625,31.375) 55,31.75 55,32.976 55.149,33.125 57,33.125 59.875,36 v1(64.5,36)
VCC: C19.2 R1.1 R7.2 U1.14 | length 10.7
  Top Layer w0.254: U1.14 59.231,34.75 60.481,36 R1.1 61.55,35.95 C19.2 61.55,32.274 61.699,32.125 63.351,32.125 63.5,31.976 R7.2
Vin: C7.1 C8.1 C9.1 C10.1 C11.1 C12.1 C20.1 MP1.1 Q1.2 R3.1 U1.20 | length 5.5
  Top Layer w0.254: R3.1@56.814,41.662 57.713,41.662 58,41.375 58,38.743 57.25,37.993 U1.20
  Top Layer w1: R3.1@56.696,41.726 R3.1 R3.1@56.814,41.662
Vout: C13.1 C14.1 C15.1 C16.1 C17.1 C18.1 C21.1 L1.2 MP3.1 R4.1 R6.1 | length 3.2
  Top Layer w0.254: R4.1@58.351,23 R4.1@58.476,23.125 ; v1(60,23.625) R6.1
  other v1: 111.75,17.625 112.5,17.625 111.75,18.375 112.5,18.375 111.75,19.125 112.5,19.125 111.75,19.875 112.5,19.875 111.75,20.625 112.5,20.625 111.75,21.375 112.5,21.375 111.75,22.125 112.5,22.125 59.375,23 60,23 60.625,23 59.375,23.625 60.625,23.625 111.75,25 112.5,25 111.75,25.75 112.5,25.75 111.75,26.5 112.5,26.5 111.75,27.25 112.5,27.25 111.75,28 112.5,28 111.75,28.75 112.5,28.75 111.75,29.5 112.5,29.5 111.75,32.75 112.5,32.75 111.75,33.5 112.5,33.5 111.75,34.25 112.5,34.25 111.75,35 112.5,35 111.75,35.75 112.5,35.75 111.75,36.5 112.5,36.5 111.75,37.25 112.5,37.25 111.75,40.125 112.5,40.125 111.75,40.875 112.5,40.875 111.75,41.625 112.5,41.625 111.75,42.375 112.5,42.375 111.75,43.125 112.5,43.125 111.75,43.875 112.5,43.875 111.75,44.625 112.5,44.625 111.75,47.75 112.5,47.75 111.75,48.5 112.5,48.5 111.75,49.25 112.5,49.25 111.75,50 112.5,50 111.75,50.75 112.5,50.75 111.75,51.5 112.5,51.5 111.75,52.25 112.5,52.25 111.75,55.625 112.5,55.625 111.75,56.375 112.5,56.375 111.75,57.125 112.5,57.125 111.75,57.875 112.5,57.875 111.75,58.625 112.5,58.625 111.75,59.375 112.5,59.375 111.75,60.125 112.5,60.125
pads on no net: U1.7 U1.9 U1.16

## Polygon pours and split planes (outlines as drawn)
Vin on Top Layer "VIN_L01_P006" (solid, pour order 6): 5.006,0.006 cw(c5.006,5.006) 0.006,5.006 0.006,65.006 cw(c5.006,65.006) 5.006,70.006 145.006,70.006 cw(c145.006,65.006) 150.006,65.006 150.006,5.006 cw(c145.006,5.006) 145.006,0.006
Vout on Bottom Layer "VOUT_L04_P007" (solid, pour order 7): 5.006,0.006 cw(c5.006,5.006) 0.006,5.006 0.006,65.006 cw(c5.006,65.006) 5.006,70.006 145.006,70.006 cw(c145.006,65.006) 150.006,65.006 150.006,5.006 cw(c145.006,5.006) 145.006,0.006
GND on Layer 1 "GND_L02_P010" (solid, pour order 10): 5.006,0.006 cw(c5.006,5.006) 0.006,5.006 0.006,65.006 cw(c5.006,65.006) 5.006,70.006 145.006,70.006 cw(c145.006,65.006) 150.006,65.006 150.006,5.006 cw(c145.006,5.006) 145.006,0.006
GND on Layer 2 "GND_L03_P011" (solid, pour order 11): 5.006,0.006 cw(c5.006,5.006) 0.006,5.006 0.006,65.006 cw(c5.006,65.006) 5.006,70.006 145.006,70.006 cw(c145.006,65.006) 150.006,65.006 150.006,5.006 cw(c145.006,5.006) 145.006,0.006

## Other copper
Top Layer:
  region net GND: 122.5,22.429 118.245,22.429 118.245,17 122.5,17
  rectangle net Vout: 111.375,17.071 115.63,22.5
  rectangle net Vout: 111.375,24.571 115.63,30
  region net GND: 122.5,30.304 118.245,30.304 118.245,24.875 122.5,24.875
  rectangle net Vout: 111.375,32.321 115.63,37.75
  region net GND: 122.5,37.929 118.245,37.929 118.245,32.5 122.5,32.5
  rectangle net Vout: 111.375,39.821 115.63,45.25
  region net GND: 122.5,45.429 118.245,45.429 118.245,40 122.5,40
  rectangle net Vout: 111.375,47.446 115.63,52.875
  region net GND: 122.5,53.179 118.245,53.179 118.245,47.75 122.5,47.75
  region net GND: 122.5,60.679 118.245,60.679 118.245,55.25 122.5,55.25
  rectangle net Vout: 111.375,55.321 115.63,60.75
  rectangle net GND: 56.25,25.25 58.75,27.375
  rectangle net GND: 53,40.875 55.125,43.125
  rectangle net GND: 48.75,34.5 51.125,39
  rectangle net GND: 62.625,32.375 65.125,34.625
  rectangle net GND: 63.5,25.625 65.875,27.5
  rectangle net GND: 26,10.321 30.255,15.75
  rectangle net GND: 26,17.821 30.255,23.25
  rectangle net GND: 26,25.571 30.255,31
  rectangle net GND: 26,33.071 30.255,38.5
  rectangle net GND: 26,40.696 30.255,46.125
  rectangle net GND: 26,48.571 30.255,54
  region net Sw: 40.25,17.75 40.75,17.25 85.25,17.25 87,19 87,57.125 85.375,58.75 46.625,58.75 44.375,56.5 44.375,51.375 43.625,50.625 41.125,50.625 40.5,50 40.5,46.125 40.875,45.75 58,45.75 58.5,45.25 58.5,38 58,38 57.75,37.75 57.75,37.125 58.625,37.125 59,37.5 59,39.25 59.5,39.75 61.75,39.75 62.5,40.5 62.5,42.25 66.125,42.25 66.125,25.25 63.25,25.25 63.25,27.25 63,27.5 61.75,27.5 61.25,27 61.25,22.25 47.75,22.25 45.25,19.75 40.75,19.75 40.25,19.25
  region net Vout: 61,27.25 59.25,27.25 59.25,24.15 57.784,24.15 57.5,23.866 57.5,22.75 57.625,22.625 61,22.625
Bottom Layer:
  region net Sw: 59.063,44.313 59.438,44.688 61.563,44.688 61.937,44.312 61.937,42.563 61.687,42.312 59.312,42.313 59.063,42.562 59.063,43.563
  region net Sw: 61.25,24 61.625,24.375 63.75,24.375 64.125,24 64.125,22.25 63.875,22 61.5,22 61.25,22.25 61.25,23.25

## Silkscreen, mask and mechanical layers (free items; w line width, h text height)
Top Overlay:
  drawing of 7 lines, arcs and shapes, not listed
  text "Vout" at 132.461,39.129 h1.52
  text "Vin" at 13.096,39.004 h1.52
  text "12V, 40A" at 129.287,36.512 h1.52
  text "25-37.5V" at 9.287,36.129 h1.52
  text "GND" at 133.219,9.129 h1.52
  text "GND" at 12.969,8.754 h1.52
  text "Daniel Bishara" at 45.379,6.629 h1.52
  text "M4" at 89.5,6.5 h2
  text "Stage 2 DC-DC" at 45.504,4.137 h1.52
Mechanical 1:
  the board outline again, w0.013

## Text inside footprints (layer, text, board x,y; h text height)
C20: Top Overlay "+" at 36.201,59.25 h1.5
C21: Top Overlay "+" at 112.476,12 h1.5 r180